# Altium PCB PCB1.PcbDoc
Units mil, origin at the board's own origin, x right, y up, seen from the top; angles counter-clockwise.
Board outline 2530 x 1490 mil, 2 copper layers (Top Layer, Bottom Layer); 16 components, 13 nets, 56 pads, 0 vias.
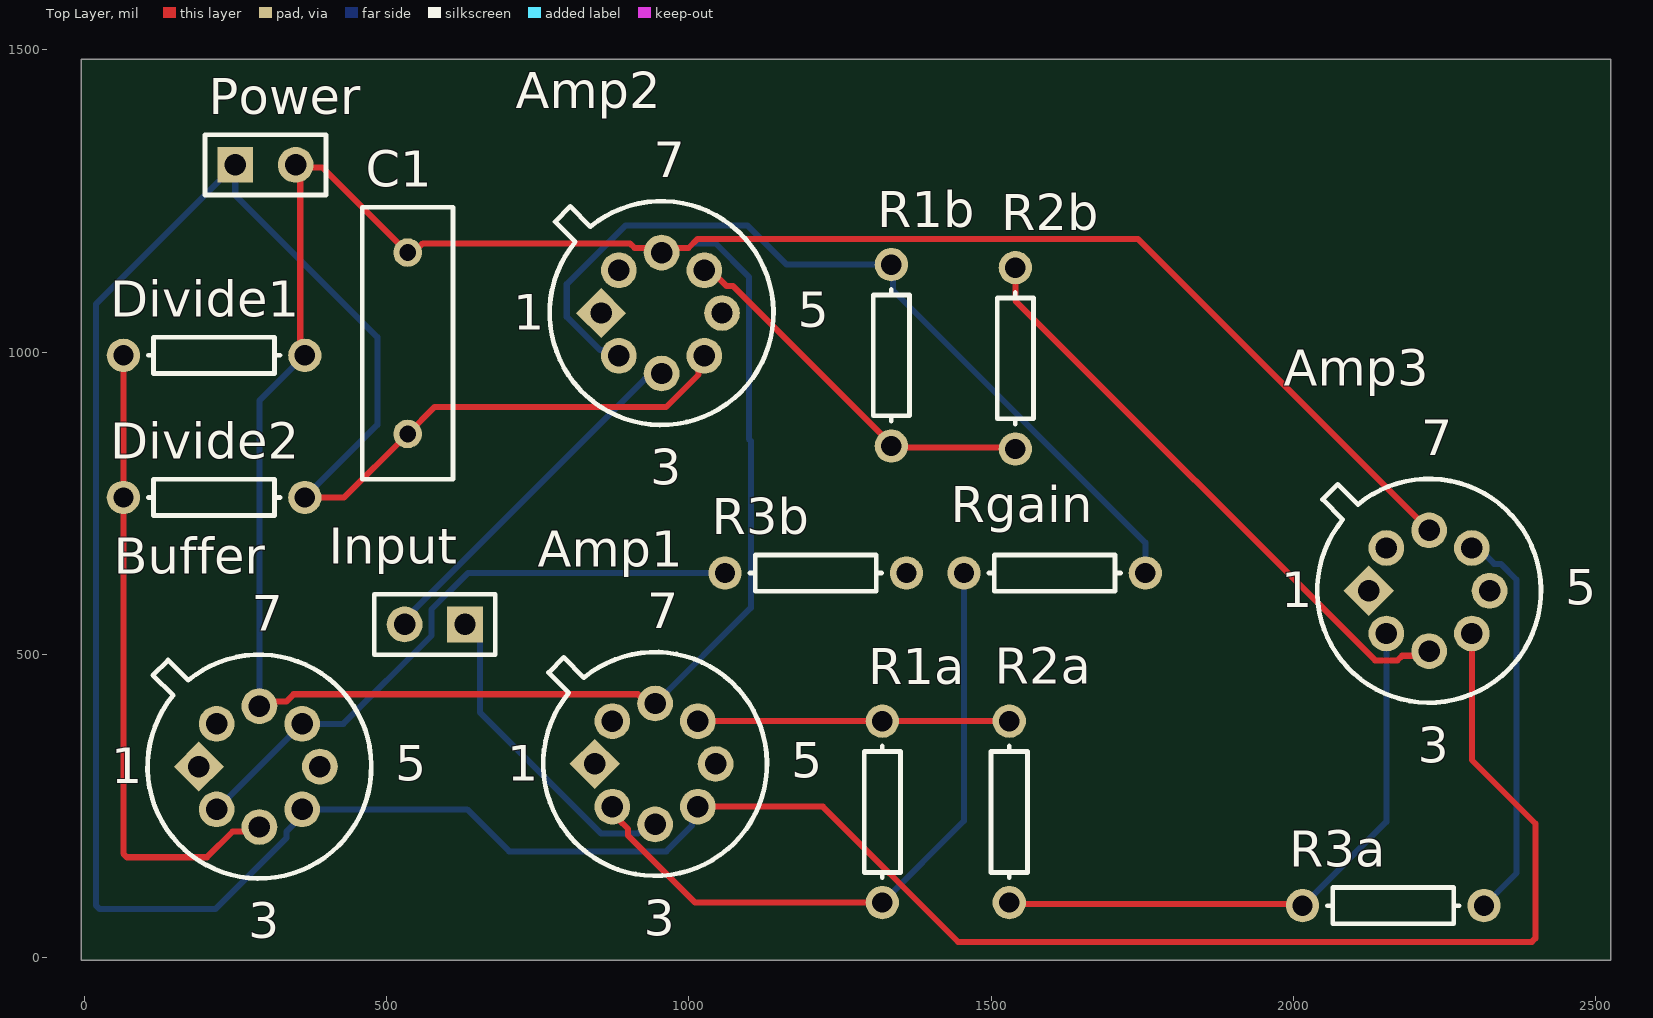
[diagram p0: Top Layer view]
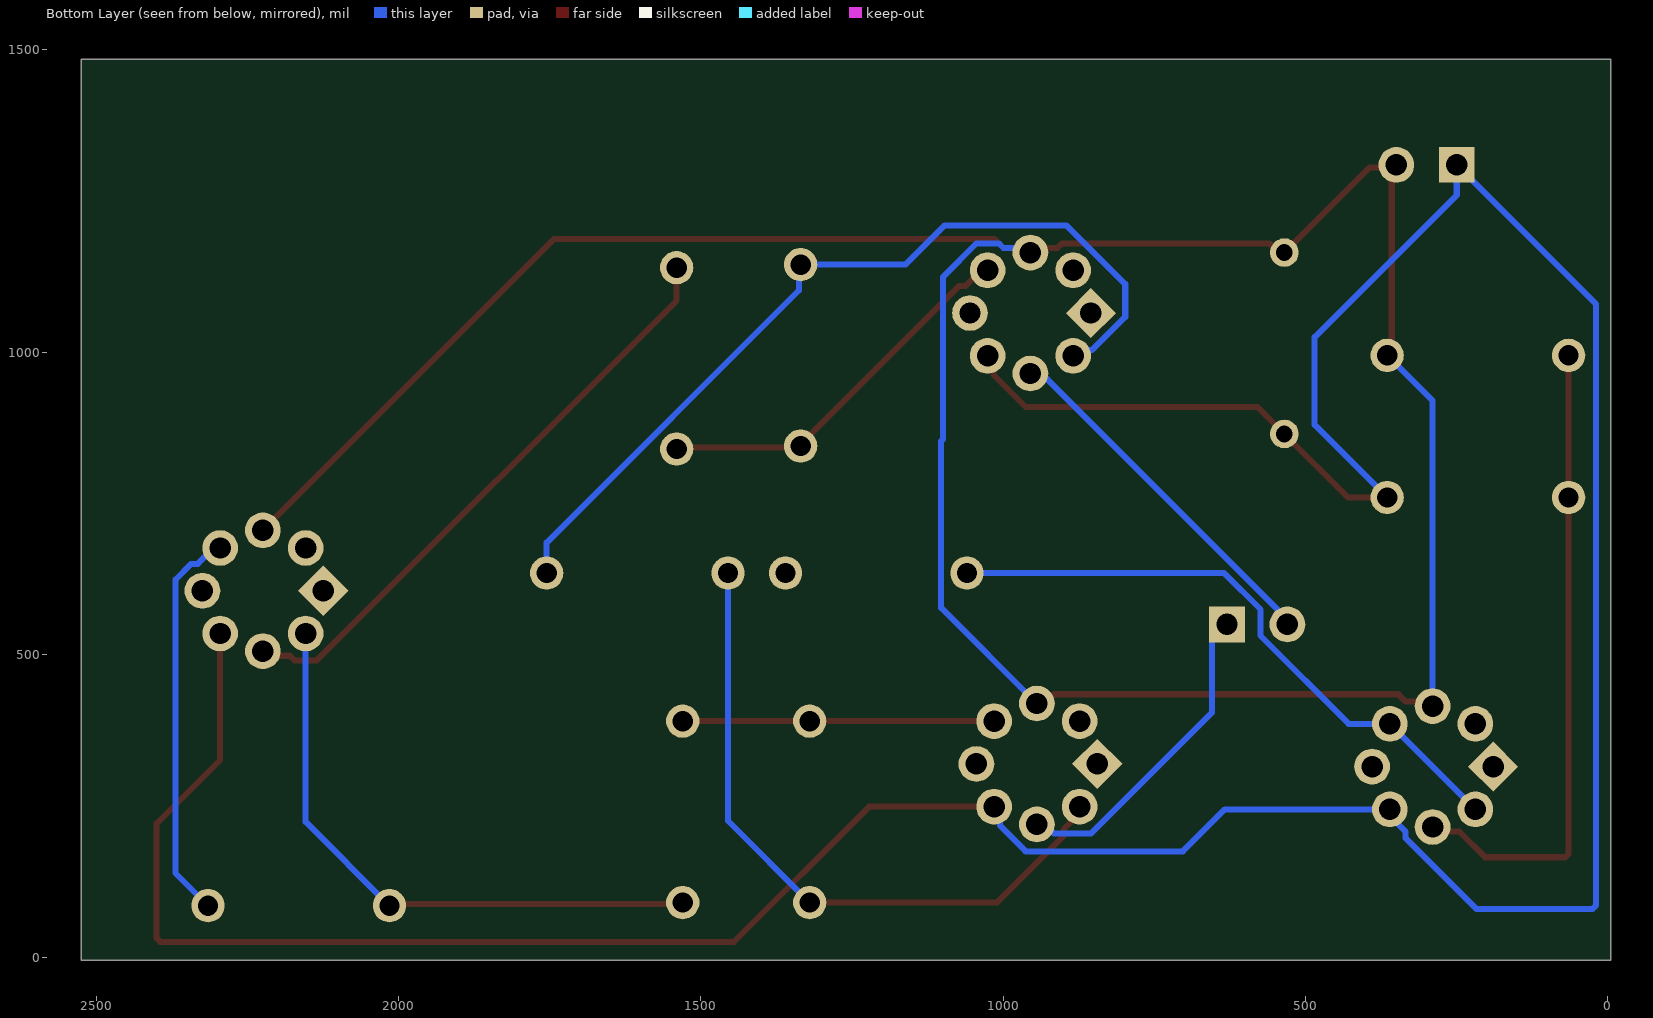
[diagram p1: Bottom Layer view, seen from below]

## Layer stack, top to bottom
Top Solder: solder mask 0.4, Solder Resist, Dk 3.5
Top Layer: signal copper 1.4
Dielectric 1: dielectric 12.6, FR-4, Dk 4.8
Bottom Layer: signal copper 1.4
Bottom Solder: solder mask 0.4, Solder Resist, Dk 3.5

## Board outline
-5,-5 -5,1485 2525,1485 2525,-5

## Design rules (kind name [scope] priority, off if disabled: settings)
Clearance [All] p1: gap=10 ignorepadtopadclearanceinfootprint=FALSE except(0: Arc-Hole Track-Hole SMDPad-Hole THPad-Hole Via-Hole Fill-Hole Poly-Hole Region-Hole Text-Hole)
PolygonConnect [All] p1: connectstyle=Relief reliefconductorwidth=10 reliefentries=4 polygonreliefangle="90 Angle" airgapwidth=10
RoutingVias [All] p1: holewidth=28 width=50 viastyle="Through Hole" minholewidth=28 minwidth=50 maxholewidth=28 maxwidth=50
SolderMaskExpansion [All] p1: expansion=4 istentingtop=FALSE
Width [All] p1: maxlimit=10 minlimit=10 preferedwidth=10
30 further rules are at their usual default settings.

## Components (designator, comment, footprint, x,y, rotation, side; value= is the part's Value field where it differs from the comment)
Amp1 "Op Amp" H-08A 944.29,319.29 r0 top
Amp2 "Op Amp" H-08A 955,1065 r0 top
Amp3 "Op Amp" H-08A 2224.29,605.71 r0 top
Buffer "Op Amp" H-08A 290,315 r0 top
C1 "Cap" RAD-0.3 535,1015 r270 top value=100nF
Divide1 "Res1" AXIAL-0.3 215,995 r0 top value=1K
Divide2 "Res1" AXIAL-0.3 215,760 r180 top value=1K
Input "Inputs" HDR1X2 630,550 r180 top (schematic designator P2)
Power "Power" HDR1X2 250,1310 r0 top (schematic designator P1)
R1a "40k" AXIAL-0.3 1320,240 r90 top
R1b "40k" AXIAL-0.3 1335,995 r90 top
R2a "Res1" AXIAL-0.3 1530,240 r270 top value=40k
R2b "Res1" AXIAL-0.3 1540,990 r90 top value=40k
R3a "Res1" AXIAL-0.3 2165,85 r0 top value=40k
R3b "Res1" AXIAL-0.3 1210,635 r180 top value=40k
Rgain "100k" AXIAL-0.3 1605,635 r180 top

## Footprints (in the part's own frame and the unit in brackets; to place one, negate y for a bottom-side part, rotate by r counter-clockwise, add the part's x,y. Pads: shape width x height; smd on the part's side, far side on the other; paste and mask are expansions set on the pad)
AXIAL-0.3 [mm] "Axial Device, Thru-Hole; 2 Leads; 0.3 in Pin Spacing"
  round 1.4 hole 0.85: 1(-3.81,0) 2(3.81,0)
  silkscreen extent -2.77,-0.76 2.77,0.76
H-08A [mm] "Can; 8 Leads; Pin Circle Dia. 5.08 mm; Lead Dia. 0.53 mm (max)"
  rect 1.5x1.5 hole 0.9 rot 45: 1(-2.54,0)
  round 1.5 hole 0.9: 2(-1.796,-1.796) 3(0,-2.54) 4(1.796,-1.796) 5(2.54,0) 6(1.796,1.796) 7(0,2.54) 8(-1.796,1.796)
  silkscreen extent -4.7,-4.7 4.7,4.7
HDR1X2 [mm] "Connector; Header; 2 Position"
  rect 1.5x1.5 hole 0.9: 1(0,0)
  round 1.5 hole 0.9: 2(2.54,0)
  silkscreen extent -1.27,-1.27 3.81,1.27
RAD-0.3 [mm] "Radial Cap, Thru-Hole; 2 Leads; 0.3 in Pin Spacing"
  round 1.2 hole 0.7: 1(-3.81,0) 2(3.81,0)
  silkscreen extent -5.71,-1.91 5.71,1.91

## Part data
Amp1 Amp2 Amp3 Buffer: "FET Operational Amplifier", ComponentLink1Description="Manufacturer Link", ComponentLink1URL=http://www.analog.com/, DatasheetVersion="REV. B", LatestRevisionDate=17-Jul-2002, LatestRevisionNote="Re-released for DXP Platform.", PackageDescription="Can; 8 Leads; Pin Circle Dia. 5.08 mm; Lead Dia. 0.53 mm (max)", PackageReference=H-08A, PackageVersion=1990, Published=8-Jun-2000, Publisher="Altium Limited"
C1: "Capacitor", LatestRevisionDate=17-Jul-2002, LatestRevisionNote="Re-released for DXP Platform.", PackageDescription="Radial Cap, Thru-Hole; 2 Leads; 0.3 in Pin Spacing", PackageReference=RAD-0.3, Published=8-Jun-2000, Publisher="Altium Limited"
Divide1 Divide2 R2a R2b R3a R3b: "Resistor", LatestRevisionDate=17-Jul-2002, LatestRevisionNote="Re-released for DXP Platform.", PackageDescription="Axial Device, Thru-Hole; 2 Leads; 0.3 in Pin Spacing", PackageReference=AXIAL-0.3, Published=8-Jun-2000, Publisher="Altium Limited"
Input Power: library part "Header 2", "Header, 2-Pin", LatestRevisionDate=17-Jul-2002, LatestRevisionNote="Re-released for DXP Platform.", Publisher="Altium Limited"
R1a R1b Rgain: library part Res1, "Resistor", LatestRevisionDate=17-Jul-2002, LatestRevisionNote="Re-released for DXP Platform.", PackageDescription="Axial Device, Thru-Hole; 2 Leads; 0.3 in Pin Spacing", PackageReference=AXIAL-0.3, Published=8-Jun-2000, Publisher="Altium Limited"

## Nets (pads, with @x,y where several pads share a name; then routed paths per layer and width w, separated by ;. In a path a pad name is that pad's centre, name@x,y a point inside that pad or via, vN(x,y) a via of type N, cw(c..) or ccw(c..) an arc to the next point about the centre after c; other vN are vias at no path point)
1Inv: Amp1.2 R1a.1 Rgain.2 | length 1156.1
  Top Layer w10: Amp1.2 893.9,248.58 884.3,238.97 884.3,227.25 899.76,211.79 899.76,200.85 1010.61,90 R1a.1
  Bottom Layer w10: Amp1.2@873.58,237.97 Amp1.2 ; R1a.1 1455,225 Rgain.2
3Inv: Amp3.2 R2a.2 R3a.1 | length 994.5
  Top Layer w10: R2a.2 1532.5,87.5 2012.5,87.5 R3a.1
  Bottom Layer w10: R3a.1 2153.58,223.58 Amp3.2
3NoInv: Amp3.3 R2b.2 | length 991.5
  Top Layer w10: R2b.2 1540,1085.61 2135.13,490.47 2172.02,490.47 2179.76,498.21 2216.79,498.21 Amp3.3
Amp1Out: Amp1.6 R1a.2 R2a.1 | length 515
  Top Layer w10: Amp1.6 R1a.2 R2a.1
Amp2Invert: Amp2.2 R1b.2 Rgain.1 | length 1454.2
  Bottom Layer w10: Amp2.2 874.9,1003.68 853.35,1003.68 798.24,1058.79 798.24,1112.64 895.13,1209.53 1097.41,1209.53 1161.94,1145 R1b.2 1337.75,1142.25 1337.75,1102.44 1755,685.19 Rgain.1
Amp2Out: Amp2.6 R1b.1 R2b.1 | length 638.5
  Top Layer w10: Amp2.6 1036.32,1135.71 1062.5,1109.53 1073.44,1109.53 1335,847.97 R1b.1 1337.5,842.5 1537.5,842.5 R2b.1
Divider: Buffer.3 Divide1.1 Divide2.2 | length 1076.4
  Top Layer w10: Divide1.1 Divide2.2 60,755 65,750 65,170.86 70.86,165 202.97,165 245.47,207.5 282.5,207.5 Buffer.3
GND: Amp1.4 Amp2.4 Amp3.4 Buffer.4 C1.2 Divide2.1 Power.1 | length 5985
  Top Layer w10: Divide2.1@367.5,757.5 Divide2.1 430,760 532.5,862.5 532.5,867.5 C1.2 579.34,909.34 962.31,909.34 1016.32,963.35 1016.32,984.9 Amp2.4 ; Amp1.4 1221.61,248.58 1445.19,25 2394.14,25 2400,30.86 2400,220.86 2295,325.86 Amp3.4
  Bottom Layer w10: Divide2.1 485,880 485,1025 250,1260 Power.1 20,1080 20,85 25.86,79.14 217.11,79.14 334.53,196.56 334.53,207.5 360.71,233.68 Buffer.4 633.6,244.29 703.12,174.76 962.73,174.76 1005.61,217.64 1005.61,239.19 Amp1.4 ; Amp3.4@2295,524.4 Amp3.4
V1: Amp1.3 Input.1 | length 534.7
  Bottom Layer w10: Input.1 654.53,525.47 654.53,404.66 855.13,204.05 915.78,204.05 931.01,219.29 Amp1.3
V2: Amp2.3 Input.2 | length 601.9
  Bottom Layer w10: Input.2 530,558.55 927.06,955.61 945.61,955.61 Amp2.3
VDD: Amp1.7 Amp2.7 Amp3.7 Buffer.7 C1.1 Divide1.2 Power.2 | length 4696.6
  Top Layer w10: Buffer.7 297.5,422.5 334.53,422.5 346.56,434.53 915.78,434.53 931.01,419.29 Amp1.7 ; Power.2 Power.2@354.53,1305.47 ; Divide1.2 357.5,1002.5 357.5,1302.5 Power.2@354.53,1305.47 ; Amp3.7 1742.44,1187.56 1014.59,1187.56 999.53,1172.5 962.5,1172.5 Amp2.7 947.5,1172.5 910.47,1172.5 902.73,1180.24 560.32,1180.24 545.08,1165 C1.1 394.53,1305.47 Power.2@354.53,1305.47
  Bottom Layer w10: Buffer.7 290,920 Divide1.2 ; Amp1.7 1102.56,577.56 1102.56,853.3 1099.53,856.33 1099.53,1124.87 1044.15,1180.24 1007.27,1180.24 999.53,1172.5 962.5,1172.5 Amp2.7
Vout: Amp3.6 R3a.2 | length 656.9
  Bottom Layer w10: Amp3.6 2305.6,676.42 2331.79,650.24 2342.73,650.24 2368.82,624.15 2368.82,138.82 R3a.2
Vref: Buffer.2 Buffer.6 R3b.2 | length 1027.9
  Bottom Layer w10: Buffer.2 Buffer.6 428.68,385.71 574.53,531.56 574.53,574.8 634.73,635 R3b.2
pads on no net: Amp1.1 Amp1.5 Amp1.8 Amp2.1 Amp2.5 Amp2.8 Amp3.1 Amp3.5 Amp3.8 Buffer.1 Buffer.5 Buffer.8 R3b.1

## Silkscreen, mask and mechanical layers (free items; w line width, h text height)
Mechanical 1:
  the board outline again, w10
  text "Instrumentation Amplifier" at 1110,1394.99 h60
  text "(Probably)" at 1930,1289.99 h60

## Text inside footprints (layer, text, board x,y; h text height)
Amp1: Top Overlay "1" at 699.41,291.89 h59.05; Top Overlay "3" at 925.82,35.04 h59.05; Top Overlay "5" at 1169.17,296.1 h59.05; Top Overlay "7" at 931.22,543.7 h59.05
Amp2: Top Overlay "7" at 941.93,1289.41 h59.05; Top Overlay "5" at 1179.88,1041.81 h59.05; Top Overlay "3" at 936.54,780.75 h59.05; Top Overlay "1" at 710.12,1037.6 h59.05
Amp3: Top Overlay "7" at 2211.22,830.12 h59.05; Top Overlay "5" at 2449.17,582.52 h59.05; Top Overlay "3" at 2205.82,321.46 h59.05; Top Overlay "1" at 1979.41,578.31 h59.05
Buffer: Top Overlay "7" at 276.93,539.41 h59.05; Top Overlay "5" at 514.88,291.81 h59.05; Top Overlay "3" at 271.54,30.75 h59.05; Top Overlay "1" at 45.12,287.6 h59.05